# EAGLE board beacon_1551G (EAGLE 6.1)
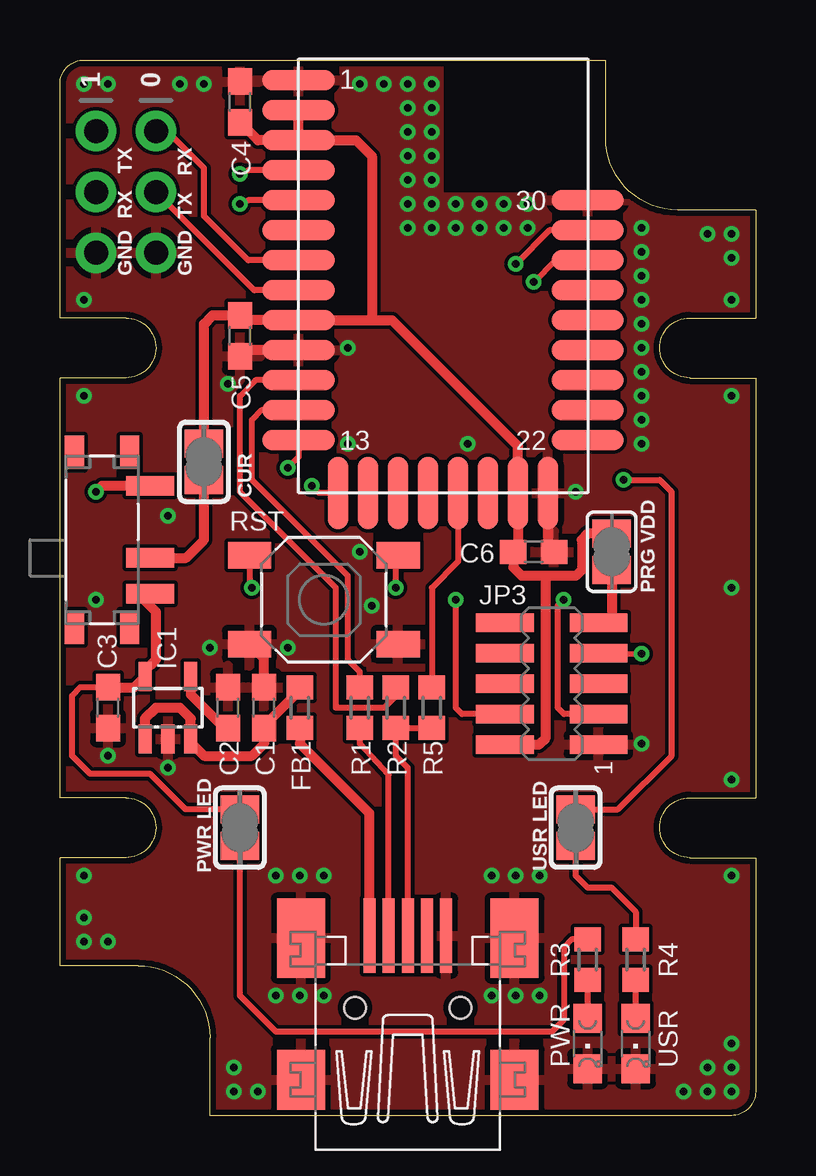
[diagram p0: board, top side]
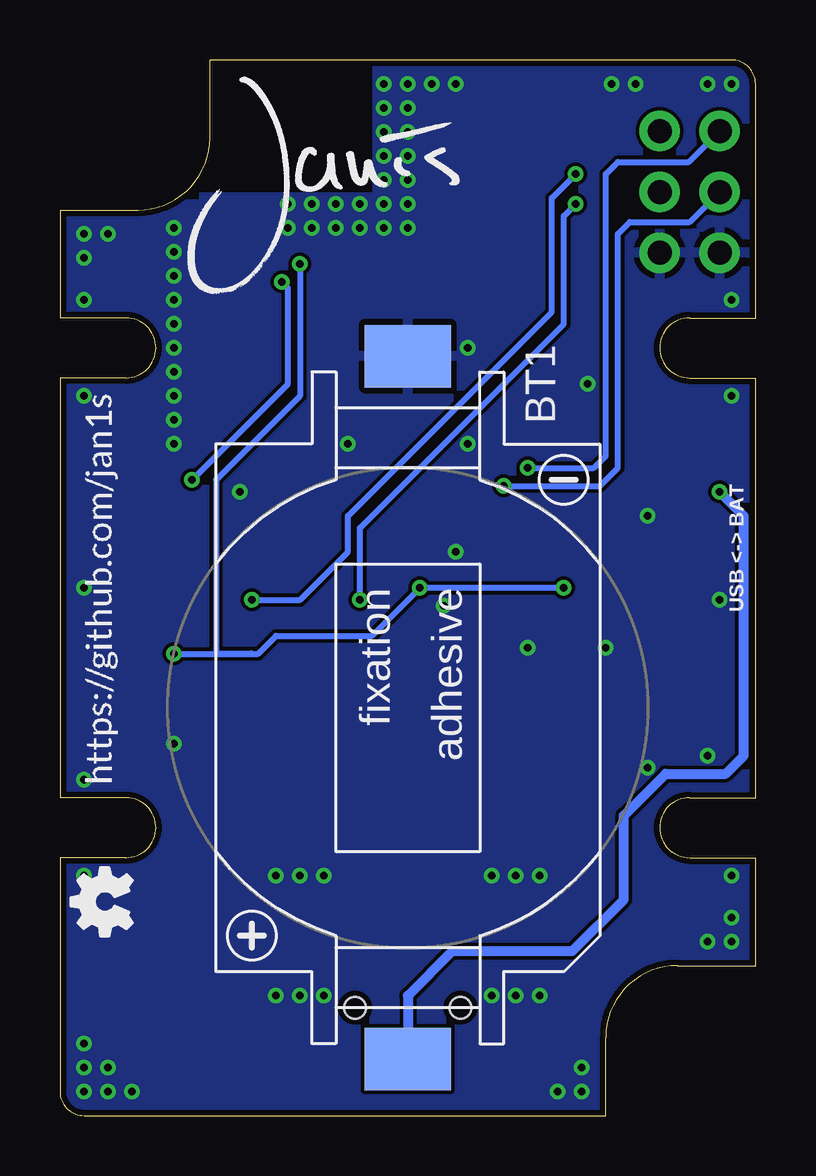
[diagram p1: board, bottom side, seen from below]

Size 29 x 44 mm. Coordinates in mm from the lower left corner, seen from the top.
Outline: 1,44 22.75,44 22.75,40.75 arc90 25.75,37.75 29,37.75 29,33.25 26.25,33.25 arc180 26.25,30.75 29,30.75 29,13.25 26.25,13.25 arc180 26.25,10.75 29,10.75 29,1 arc-90 28,0 6.25,0 6.25,3.25 arc90 3.25,6.25 0,6.25 0,10.75 2.75,10.75 arc180 2.75,13.25 0,13.25 0,30.75 2.75,30.75 arc180 2.75,33.25 0,33.25 0,43 arc-90 1,44
Copper layers (1*16): Top 0.035mm / dielectric 1.5mm / Bottom 0.035mm
Design rules: minimum track width 5mil, minimum drill 12mil, track to track 5mil, track to pad 5mil, pad to pad 5mil, via to via 5mil, smd to smd 0mil, copper to edge 10mil, drill to drill 10mil, minimum pad ring 10mil, minimum via ring 6mil, stop-mask expansion 2mil, vias tented up to drill 25mil, thermal gap 10mil
Net classes: 0 default: width 0.152 mm, drill 0.33 mm, clearance 0.152 mm; 1 power: width 0.254 mm, drill 0.33 mm, clearance 0.152 mm
tRestrict: area 16,38.5 to 25,44
bRestrict: area 16,38.5 to 25,44

## Footprints (pad centres in the part's own frame; a part is rotated, then mirrored left to right if it is on the bottom)
1X03_ROUND = drill 1 pad 1.676: 1 -2.54,0; 2 0,0; 3 2.54,0
CH28-2032LF = smd 3.6 x 2.6: NEG 0,-14.65; POS 0,14.65
C0603 = smd 1.1 x 1: 1 -0.85,0; 2 0.85,0
SOLDERJUMPER_CLOSEDWIRE = smd 1.168 x 1.6: 1 -0.762,0; 2 0.762,0 | smd 0.635 x 0.203: WIRE 0,0
R0603 = smd 1 x 1.1: 1 -0.85,0; 2 0.85,0
SOT23-5 = smd 0.55 x 1.2: 1 -0.95,-1.3; 2 0,-1.3; 3 0.95,-1.3; 4 0.95,1.3; 5 -0.95,1.3
20021121-10010XXLF = smd 0.76 x 2.4: 1 -2.54,-1.95; 2 -2.54,1.95; 3 -1.27,-1.95; 4 -1.27,1.95; 5 0,-1.95; 6 0,1.95; 7 1.27,-1.95; 8 1.27,1.95; 9 2.54,-1.95; 10 2.54,1.95
CHIPLED_0805 = smd 1.2 x 1.2: A 0,-1.05; C 0,1.05
40-40 = smd 1.8 x 1.1: 1 -3.1,1.85; 2 3.1,1.85; 3 -3.1,-1.85; 4 3.1,-1.85
SJ = smd 1.168 x 1.6: 1 -0.762,0; 2 0.762,0
BLE112-A = smd 3 x 0.85: AVDD1 -6.05,6.9; AVDD2 -6.05,5.65; GND1 -6.05,8.15; GND2 -6.05,-3.1; GND4 6,3.15; P0_0 6,0.65; P0_1 6,-0.6; P0_2 6,-1.85; P0_3 6,-3.1; P0_4 6,-4.35; P0_5 6,-5.6; P0_6 6,-6.85; P1_5 -6.05,-6.85; P1_6 -6.05,-0.6; P1_7 -6.05,0.65; P2_0 -6.05,1.9; P2_1 -6.05,3.15; P2_2 -6.05,4.4; RESET 6,1.9; USB+ -6.05,-4.35; USB- -6.05,-5.6; VDD_USB -6.05,-1.85 | smd 0.85 x 3: DVDD 3.1,-9.05; GND3 4.35,-9.05; P0_7 1.85,-9.05; P1_0 0.6,-9.05; P1_1 -0.65,-9.05; P1_2 -1.9,-9.05; P1_3 -3.15,-9.05; P1_4 -4.4,-9.05
1P2T-ON-ON = smd 2 x 0.8: 1 -2,2.25; 2 -2,0.75; 3 -2,-2.25 | smd 0.8 x 1.4: S1 1.15,3.65; S2 -1.15,3.65; S3 -1.15,-3.65; S4 1.15,-3.65
32005-301 = smd 3.1 x 0.5: 1 3,1.6; 2 3,0.8; 3 3,0; 4 3,-0.8; 5 3,-1.6 | smd 2.5 x 2: M1 -3,-4.45; M2 -3,4.45 | smd 3.3 x 2: M3 2.9,4.45; M4 2.9,-4.45 | hole 0.9: 0,2.2; 0,-2.2

## Placement (x,y rotation side)
0  [1X03_ROUND]  4,38.5 270 top
1  [1X03_ROUND]  1.5,38.5 270 top
BT1  CR2032-HOLDER  [CH28-2032LF]  14.5,17 180 bottom
C1  10µF  [C0603]  8.5,17 90 top
C2  10nF  [C0603]  7,17 90 top
C3  10µF  [C0603]  2,17 270 top
C4  1µF  [C0603]  7.5,42.25 270 top
C5  1µF  [C0603]  7.5,32.5 270 top
C6  1µF  [C0603]  19.75,23.5 0 top
CURRENT  [SOLDERJUMPER_CLOSEDWIRE]  6,27.25 270 top
FB1  120R  [R0603]  10,17 270 top
IC1  LP2985-SOT23-5  [SOT23-5]  4.5,17 0 top
JP3  [20021121-10010XXLF]  20.5,18 90 top
PWR  GREEN  [CHIPLED_0805]  22,3 180 top
PWR_LED  [SOLDERJUMPER_CLOSEDWIRE]  7.5,12 90 top
R1  33R  [R0603]  12.5,17 270 top
R2  33R  [R0603]  14,17 270 top
R3  470R  [R0603]  22,6.5 270 top
R4  470R  [R0603]  24,6.5 270 top
R5  1K5  [R0603]  15.5,17 90 top
RST  TACT-SWITCH-40-40  [40-40]  11,21.5 180 top
SJ1  PRG VDD  [SJ]  23,23.5 90 top
U1  BLE112-A  [BLE112-A]  16,35 0 top
U$1  1P2T  [1P2T-ON-ON]  1.75,24 180 top
U$2  [JANIS_10MM]  24,34 0 bottom
U$4  [GITHUB/JAN1S]  26.75,13.75 90 bottom
U$5  [OSHW_FILLX100_NOTEXT]  26,7.5 90 bottom
USR  BLUE  [CHIPLED_0805]  24,3 180 top
USR_LED  [SOLDERJUMPER_CLOSEDWIRE]  21.5,12 90 top
X1  [32005-301]  14.5,4.5 90 top

## Library data of the parts
0 1 CURRENT PWR_LED USR_LED = microbuilder
BT1 = battery-holder
C1-C6 FB1 R1-R5 = rcl
IC1 = vreg
JP3 = nxp
PWR USR = led
RST = tactile-switch
SJ1 = jumper
U1 = sf-bluegiga
U$1 = switch
U$2 U$4 = pcb-artwork
U$5 = ohw-logo
X1 = con-cypressindustries; OC_FARNELL: unknown; OC_NEWARK: unknown

## Nets
3.3V [power]: C4.2 C5.1 C6.1 CURRENT.1 JP3.2 SJ1.2 U1.AVDD1 U1.AVDD2 U1.DVDD U1.VDD_USB
5V [power]: C1.1 FB1.1 IC1.1 IC1.3
GND [power]: 0.3 1.3 BT1.NEG C1.2 C2.2 C3.2 C4.1 C5.2 C6.2 IC1.2 JP3.1 PWR.C RST.1 RST.2 U1.GND1 U1.GND2 U1.GND3 U1.GND4 USR.C X1.5 X1.M1 X1.M2 X1.M3 X1.M4
N$1: PWR.A R3.2
N$2: R4.2 USR.A
N$3 [power]: PWR_LED.1 R3.1
N$4: CURRENT.2 U$1.2
N$5: R4.1 USR_LED.1
N$11: C2.1 IC1.4
P0_0: U1.P0_0 USR_LED.2
P0_1: U1.P0_1
P0_2: U1.P0_2
P0_3: U1.P0_3
P0_4: U1.P0_4
P0_5: U1.P0_5
P0_6: U1.P0_6
P0_7: U1.P0_7
P1_0: R5.2 U1.P1_0
P1_1: U1.P1_1
P1_2: U1.P1_2
P1_3: U1.P1_3
P1_4: 1.2 U1.P1_4
P1_5: 1.1 U1.P1_5
P1_6: 0.2 U1.P1_6
P1_7: 0.1 U1.P1_7
P2_0: U1.P2_0
P2_1: JP3.4 U1.P2_1
P2_2: JP3.3 U1.P2_2
P_U+: R2.2 R5.1 X1.3
P_U-: R1.2 X1.2
PRG_VDD [power]: JP3.9 SJ1.1
RESET: JP3.7 RST.3 RST.4 U1.RESET
USB+: R2.1 U1.USB+
USB-: R1.1 U1.USB-
VBUS [power]: FB1.2 X1.1
VDD_BAT: BT1.POS U$1.3
VDD_USB: C3.1 IC1.5 PWR_LED.2 U$1.1

## Tracks (layer width: path | path; a pad name or v marks a point on that pad's centre or on a via)
3.3V
  Top 0.406: 13,33.15 U1.VDD_USB 7.2,33.15 C5.1 6.35,33.35 6,33 CURRENT.1 | 13,33.15 13.85,33.15 19.1,27.9 U1.DVDD 19.1,23.55 C6.1 18.9,22.85 19.25,22.5 20.25,22.5 | U1.AVDD2 12.35,40.65 13,40 13,33.15 | U1.AVDD2 U1.AVDD1 | JP3.2 19.96,15.46 20.25,15.75 20.25,22.5 | U1.AVDD2 8.25,40.65 C4.2 | SJ1.2 22.01,24.26 21.75,24 21.75,22.75 21.5,22.5 20.25,22.5
5V
  Top 0.406: IC1.1 3.55,16.55 4,17 5,17 5.45,16.55 IC1.3 5.45,15.55 6,15 8,15 8.5,15.5 C1.1 8.5,16.25 10,17.75 FB1.1
GND  (via drill 0.33)
  Top 0.406: U1.GND2 7.75,31.9 C5.2 | U1.GND3 20.35,23.65 20.5,23.5 C6.2 | C1.2 8.5,19.05 RST.2
  other vias: 16.5,38 17.5,38 18.5,38 19.5,38 15.5,38 15.5,39 15.5,40 15.5,41 15.5,42 15.5,43 14.5,43 13.5,43 12.5,43 19.5,37 28,36.75 24.25,37 14.5,42 14.5,41 14.5,40 14.5,39 14.5,38 14.5,37 15.5,37 16.5,37 17.5,37 18.5,37 1,43 5,43 28,35.75 27,36.75 1,7.25 1,8.25 8.25,1 7.25,1 28,2 28,1 28,3 26,1 7,30.5 12,32 21.5,26 24.25,36 24.25,35 24.25,34 24.25,33 24.25,32 24.25,31 24.25,30 24.25,29 24.25,28 12,28 17,28 2,43 1.5,21.5 4.5,25 4.5,14.5 2,15 6.25,19.5 13,21.25 28,14 10,10 20,10 18,10 19,10 9.5,19.5 12.5,23.5 6,43 2,7.25 7.25,2 27,1 27,2 9,10 11,10 10,5 19,5 20,5 18,5 9,5 11,5 24.25,15.5 28,10 28,30 28,34 1,34 1,30 1,10 28,22
  pour Top: 0,0 29,0 29,38 23,38 23,44 0,44
  pour Bottom: 0,0 29,0 29,38 23,38 23,44 0,44
N$1
  Top 0.254: PWR.A R3.2
N$2
  Top 0.254: USR.A R4.2
N$3
  Top 0.254: R3.1 21.35,7.35 21,7 21,4 20.5,3.5 9,3.5 7.5,5 PWR_LED.1
N$4
  Top 0.406: U$1.2 5.25,23.25 6,24 CURRENT.2
N$5
  Top 0.254: R4.1 24,8.5 23,9.5 22,9.5 21.5,10 USR_LED.1 21.5,11
N$11
  Top 0.406: IC1.4 5.45,17.55 6.85,16.15 C2.1
P0_0  (via drill 0.33)
  Top 0.254: v19.75,34.75 20.65,35.65 U1.P0_0 | v23.5,26.5 25,26.5 25.5,26 25.5,15 23.26,12.76 USR_LED.2
  Bottom 0.254: v23.5,26.5 19.5,30.5 19.5,34.5 v19.75,34.75
P1_0
  Top 0.254: U1.P1_0 16.6,23.1 15.5,22 R5.2
P1_4  (via drill 0.33)
  Top 0.254: U1.P1_4 10.8,25.95 v10.5,26.25
  Bottom 0.254: v10.5,26.25 6.5,26.25 5.75,27 5.75,36.75 5.25,37.25 2.75,37.25 1.2
P1_5  (via drill 0.33)
  Top 0.254: U1.P1_5 9.95,27.45 v9.5,27
  Bottom 0.254: v9.5,27 6.75,27 6.25,27.5 6.25,39.25 5.75,39.75 2.79,39.75 1.1
P1_6
  Top 0.254: U1.P1_6 8.1,34.4 0.2
P1_7
  Top 0.254: U1.P1_7 7.85,35.65 6,37.5 6,39.5 4.46,41.04 0.1
P2_1  (via drill 0.33)
  Top 0.254: JP3.4 16.77,16.73 16.5,17 v16.5,21.5 | U1.P2_1 7.85,38.15 v7.5,38
  Bottom 0.254: v16.5,21.5 16.5,24.5 8,33 8,37.5 v7.5,38
P2_2  (via drill 0.33)
  Top 0.254: JP3.3 21.02,16.73 20.75,17 20.75,21.25 v21,21.5 | U1.P2_2 7.85,39.4 v7.5,39.25
  Bottom 0.254: v21,21.5 19,21.5 17,23.5 17,25 8.5,33.5 8.5,38.25 v7.5,39.25
P_U+
  Top 0.254: X1.3 14.5,14.5 14,15 R2.2 R5.1
P_U-
  Top 0.254: X1.2 13.7,14.2 12.5,15.5 R1.2
PRG_VDD
  Top 0.406: SJ1.1 23,20.5 22.49,20.5 JP3.9
RESET  (via drill 0.33)
  Top 0.254: JP3.7 23.48,19.27 v24.25,19.25 | 23.35,36.9 U1.RESET 20.4,36.9 v19,35.5 | v14,22 14,23.25 RST.3 | RST.4 7.9,22.1 v8,22
  Bottom 0.254: v24.25,19.25 21,19.25 | v19,35.5 19,30 22.5,26.5 22.5,19.32 JP3.7 21.02,19.27 21,19.25 | 21,19.25 20.75,19.25 20,20 16,20 v14,22 v8,22
USB+
  Top 0.254: R2.1 14,17.5 13.5,17 11.5,17 11.5,22 7.5,26 7.5,30 8.15,30.65 U1.USB+
USB-
  Top 0.254: R1.1 12.5,18.5 12,19 12,22.5 8,26.5 8,29 8.4,29.4 U1.USB-
VBUS
  Top 0.406: FB1.2 10,15.5 12.9,12.6 X1.1
VDD_BAT  (via drill 0.33)
  Top 0.406: U$1.3 1.75,26.25 v1.5,26
  Bottom 0.406: v1.5,26 0.5,25 0.5,15 1.25,14.25 3.75,14.25 5.5,12.5 5.5,9 7.65,6.85 12.65,6.85 14.5,5 BT1.POS
VDD_USB
  Top 0.254: PWR_LED.2 5.24,12.76 3.75,14.25 1.25,14.25 0.5,15 0.5,17.5 0.85,17.85 C3.1
  Top 0.406: C3.1 3.1,17.85 IC1.5 3.55,18.55 4,19 4,21 3.55,21.45 3.55,21.7 U$1.1

## Text on the board
tPlace: GND RX TX | GND TX RX | CUR | PRG VDD | PWR LED | USR LED
bPlace: USB <-> BAT